# Altium PCB HTMD-PREAMP2.PcbDoc (part 1 of 2)
Units mm, origin at the board's own origin, x right, y up, seen from the top; angles counter-clockwise.
Board outline 220 x 58 mm, 8 copper layers (Top Layer, GND1, S2, POWER1, GND2, S3, POWER2, Bottom Layer); 267 components, 129 nets, 701 pads, 82 vias.
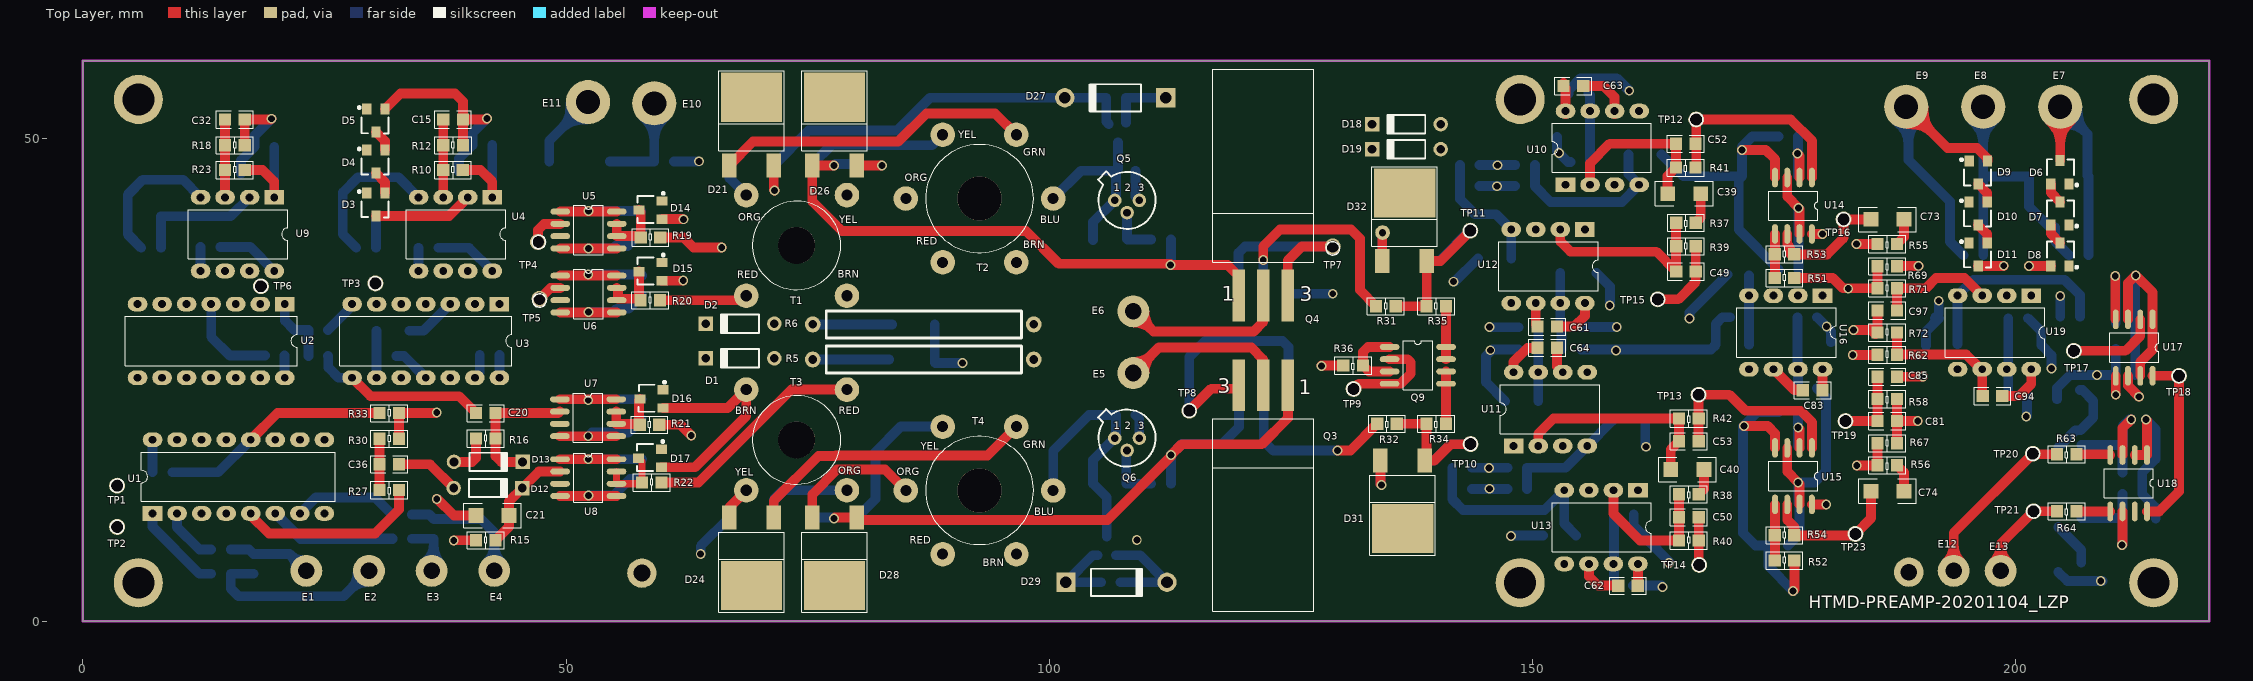
[diagram p0: Top Layer view]
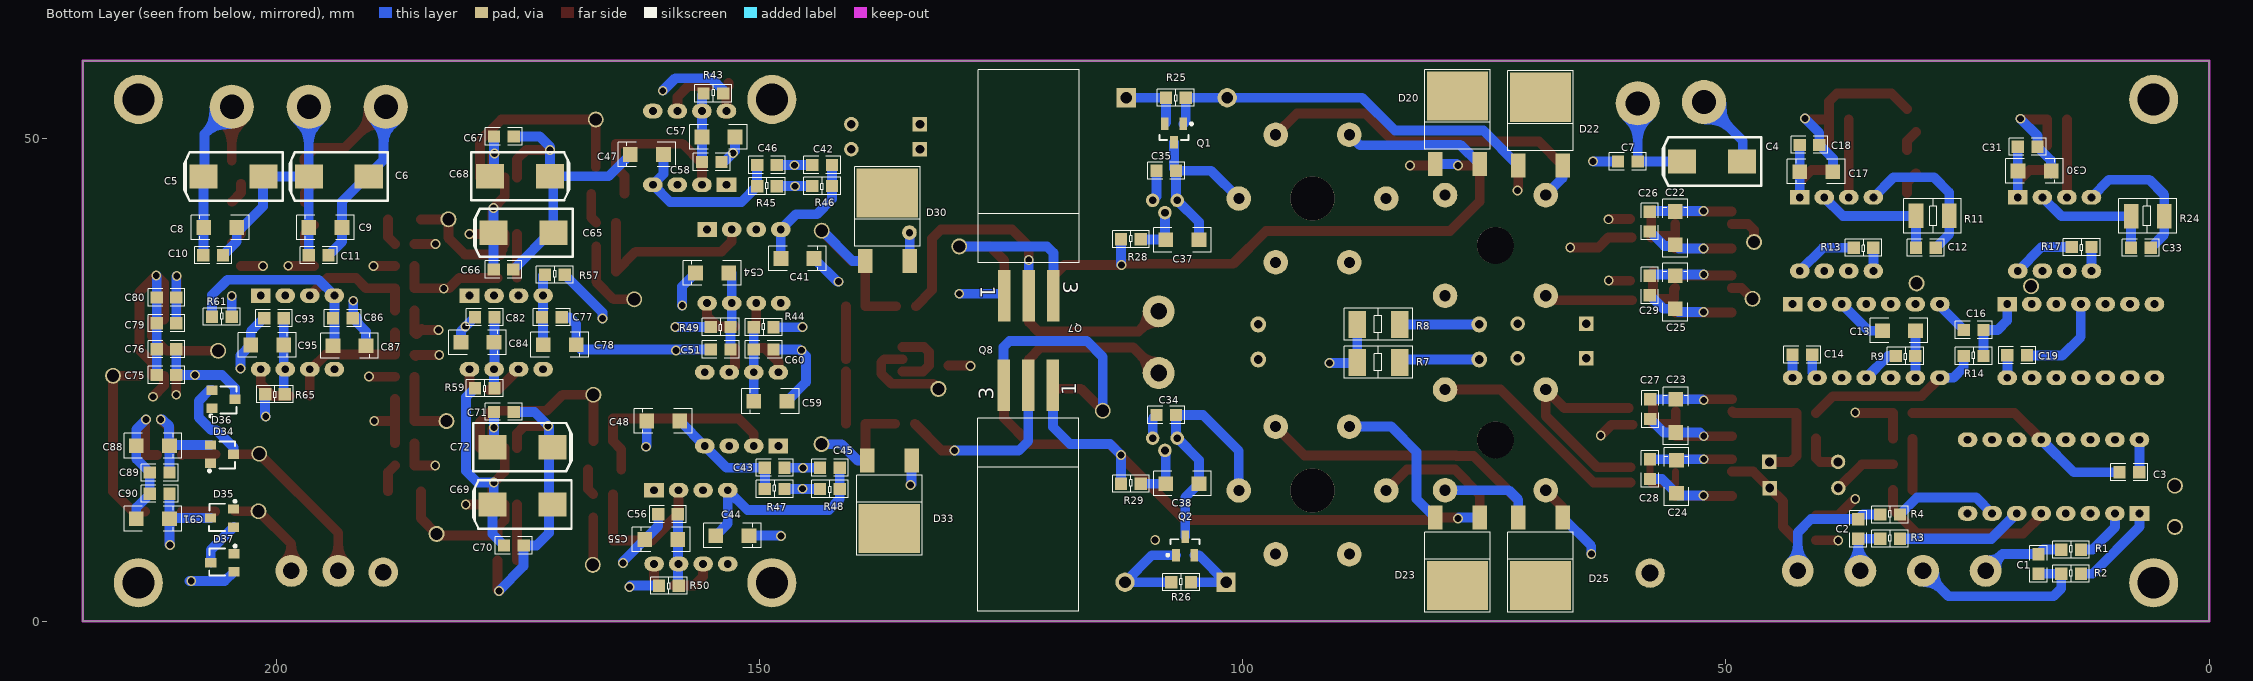
[diagram p1: Bottom Layer view, seen from below]
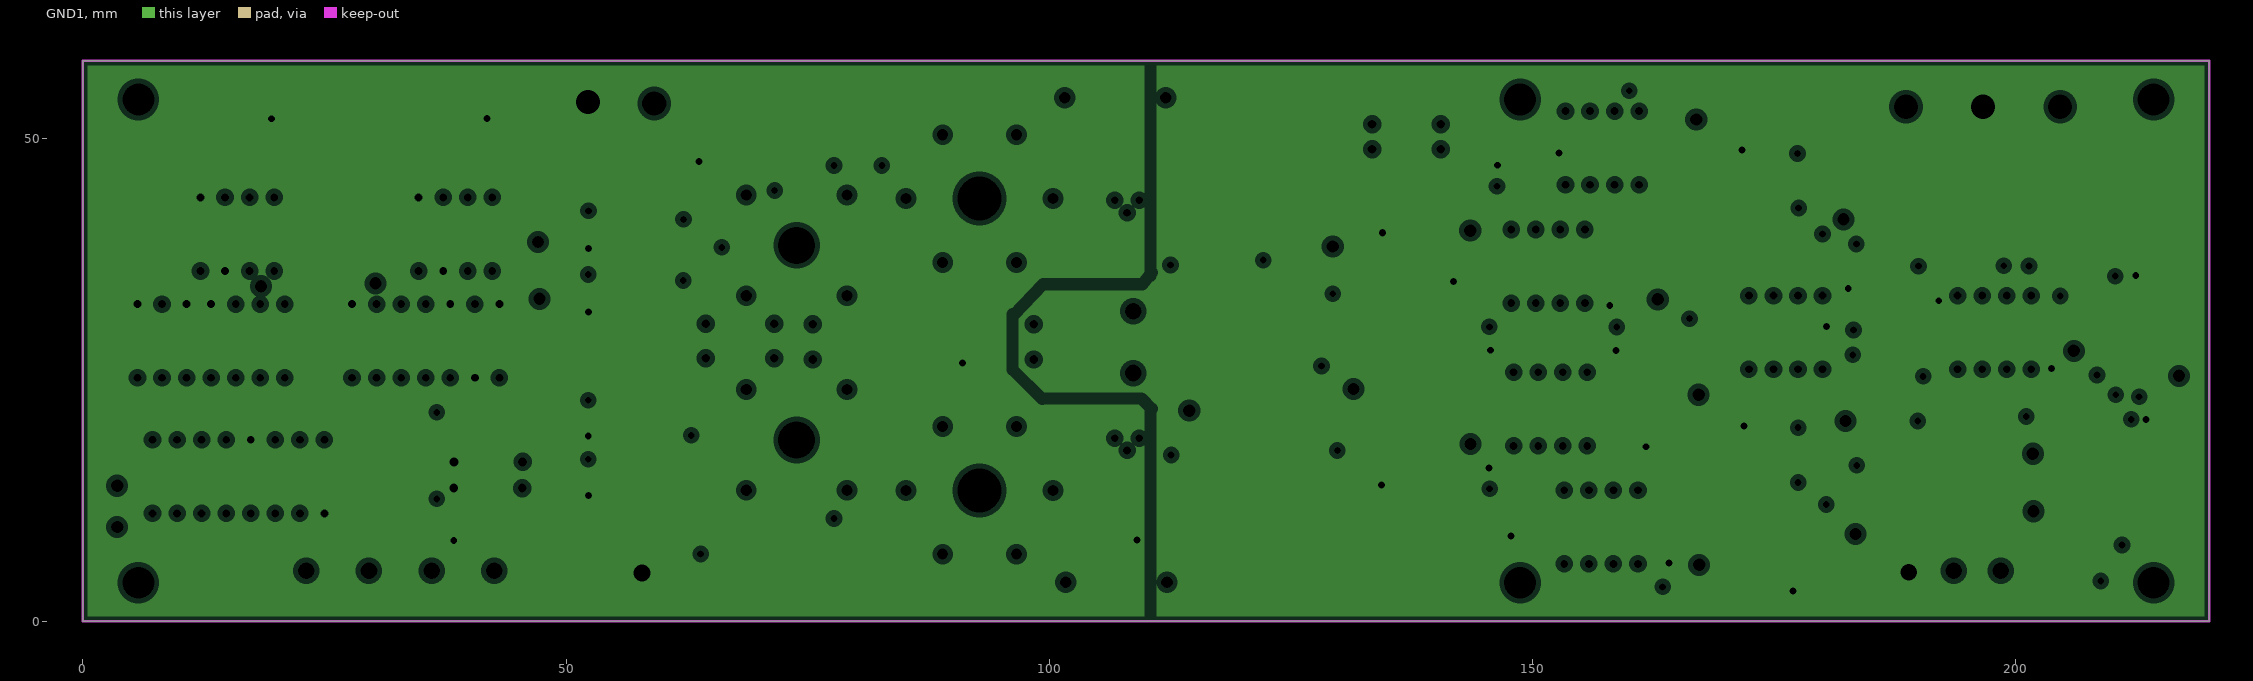
[diagram p2: GND1, clearances drawn from the general rule]
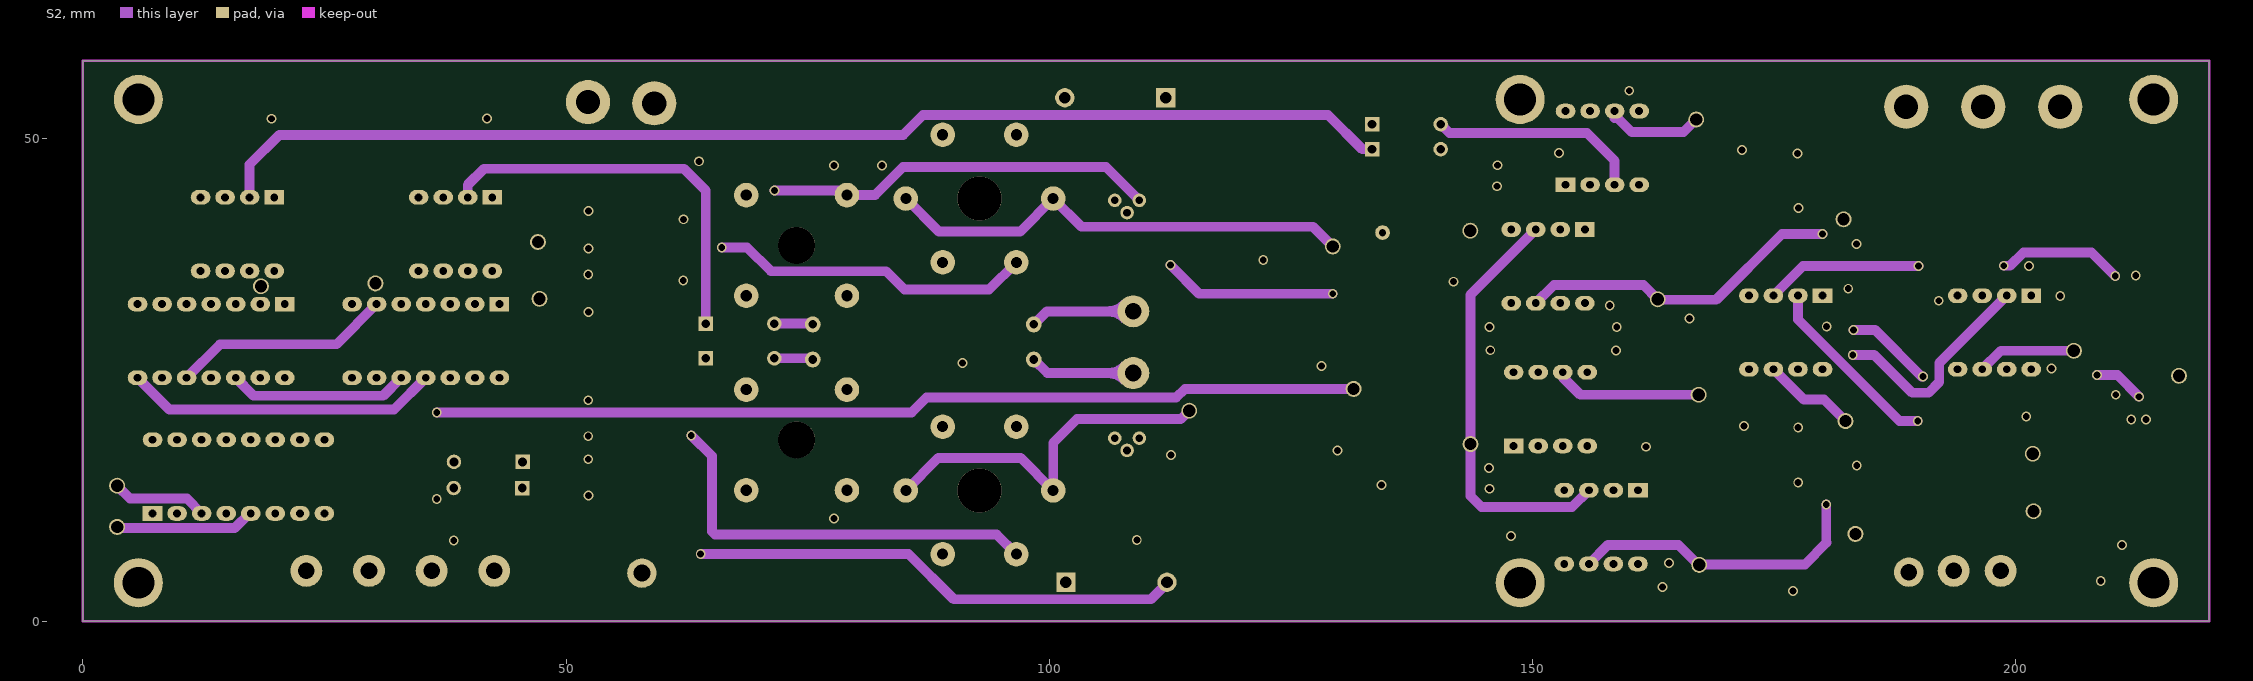
[diagram p3: S2]
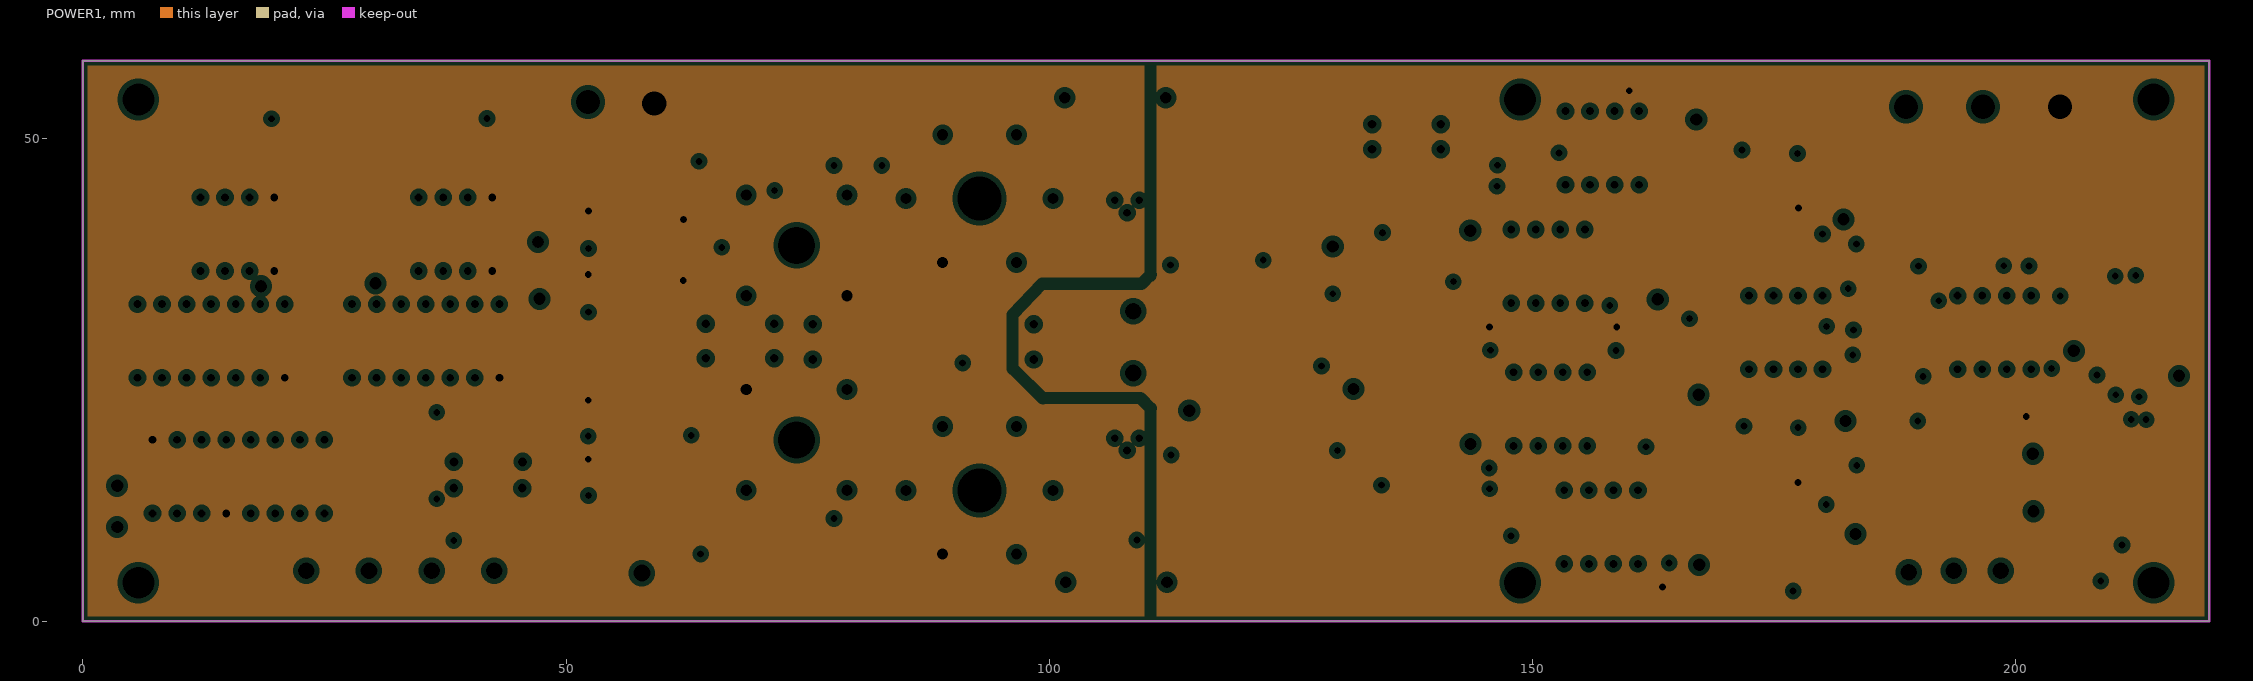
[diagram p4: POWER1, clearances drawn from the general rule]
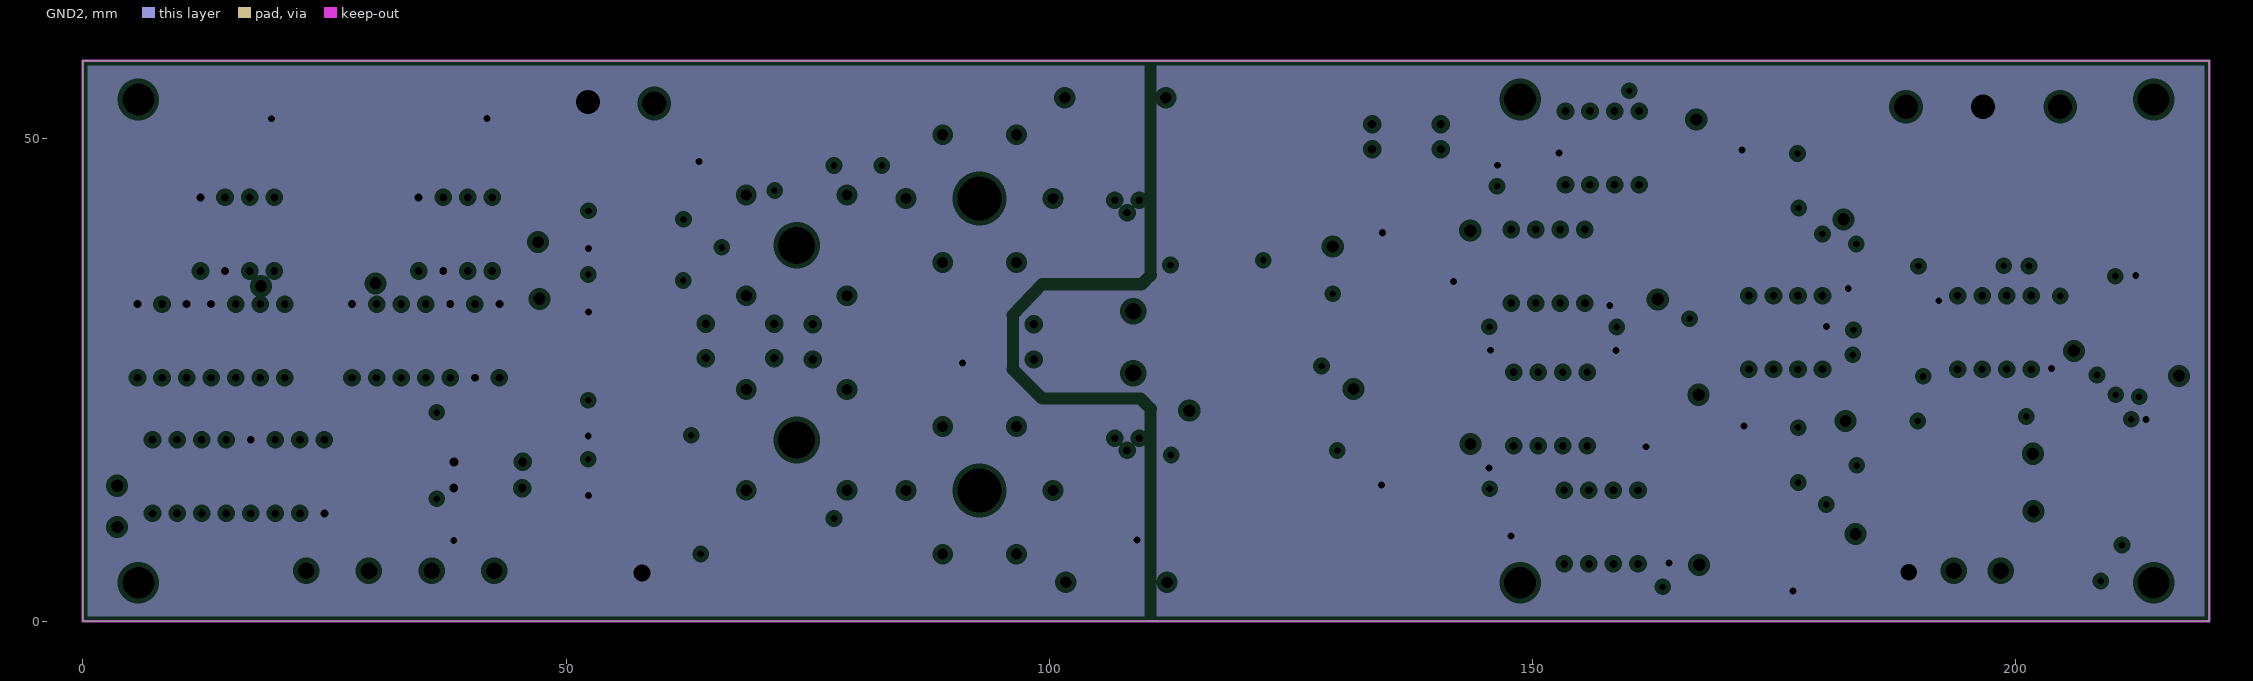
[diagram p5: GND2, clearances drawn from the general rule]
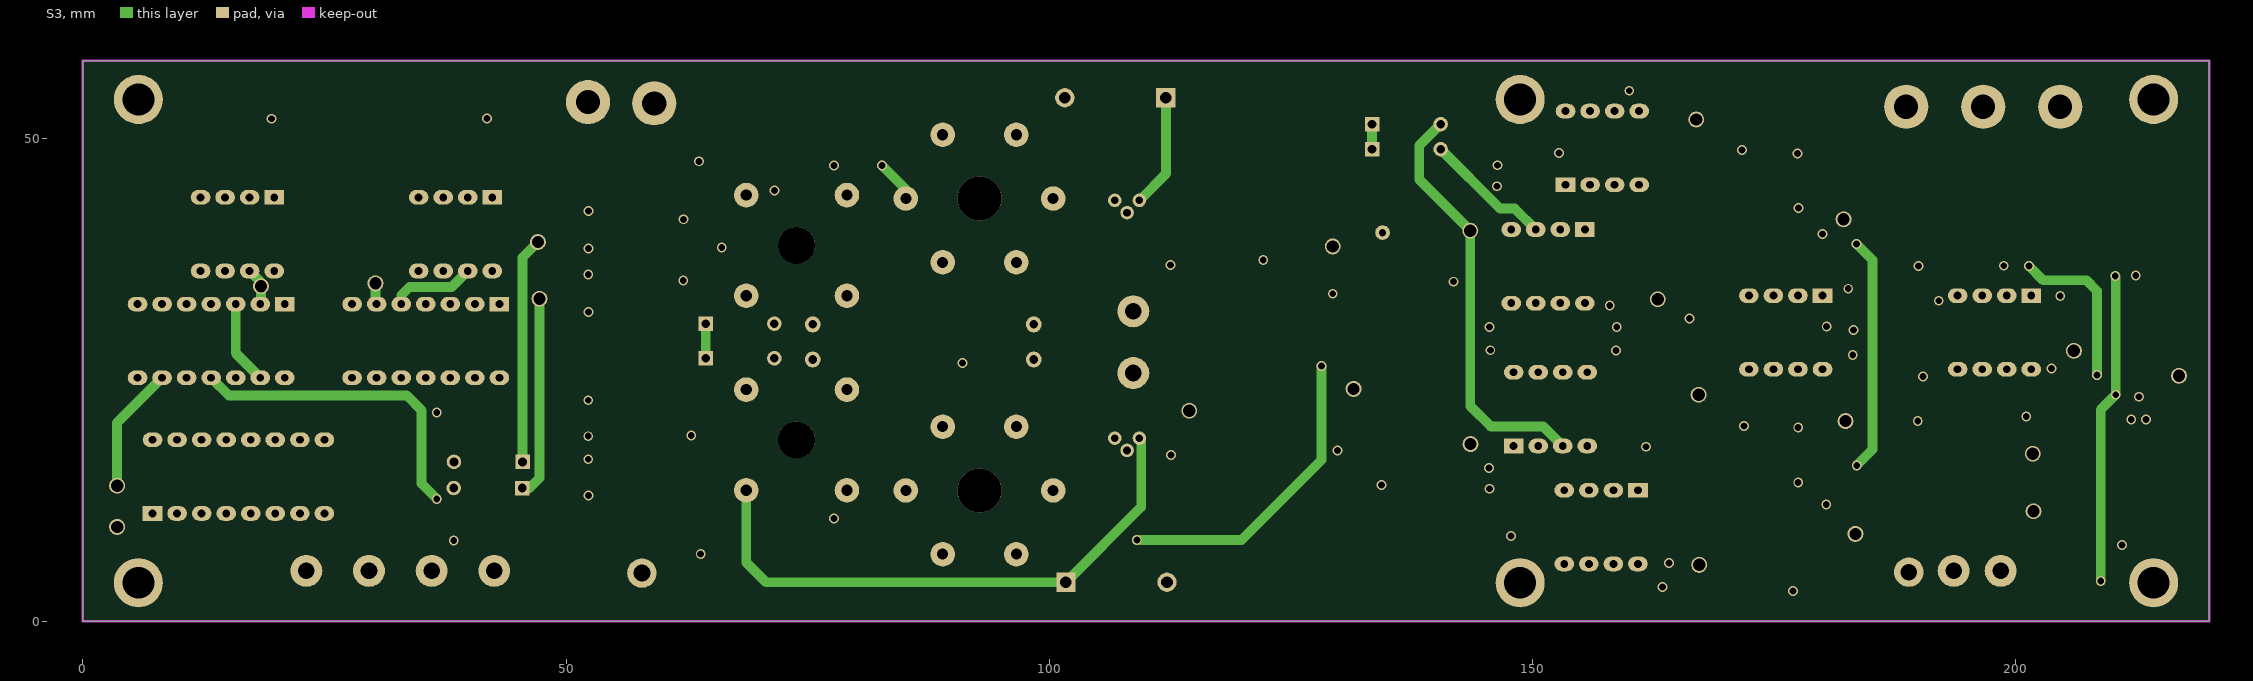
[diagram p6: S3]
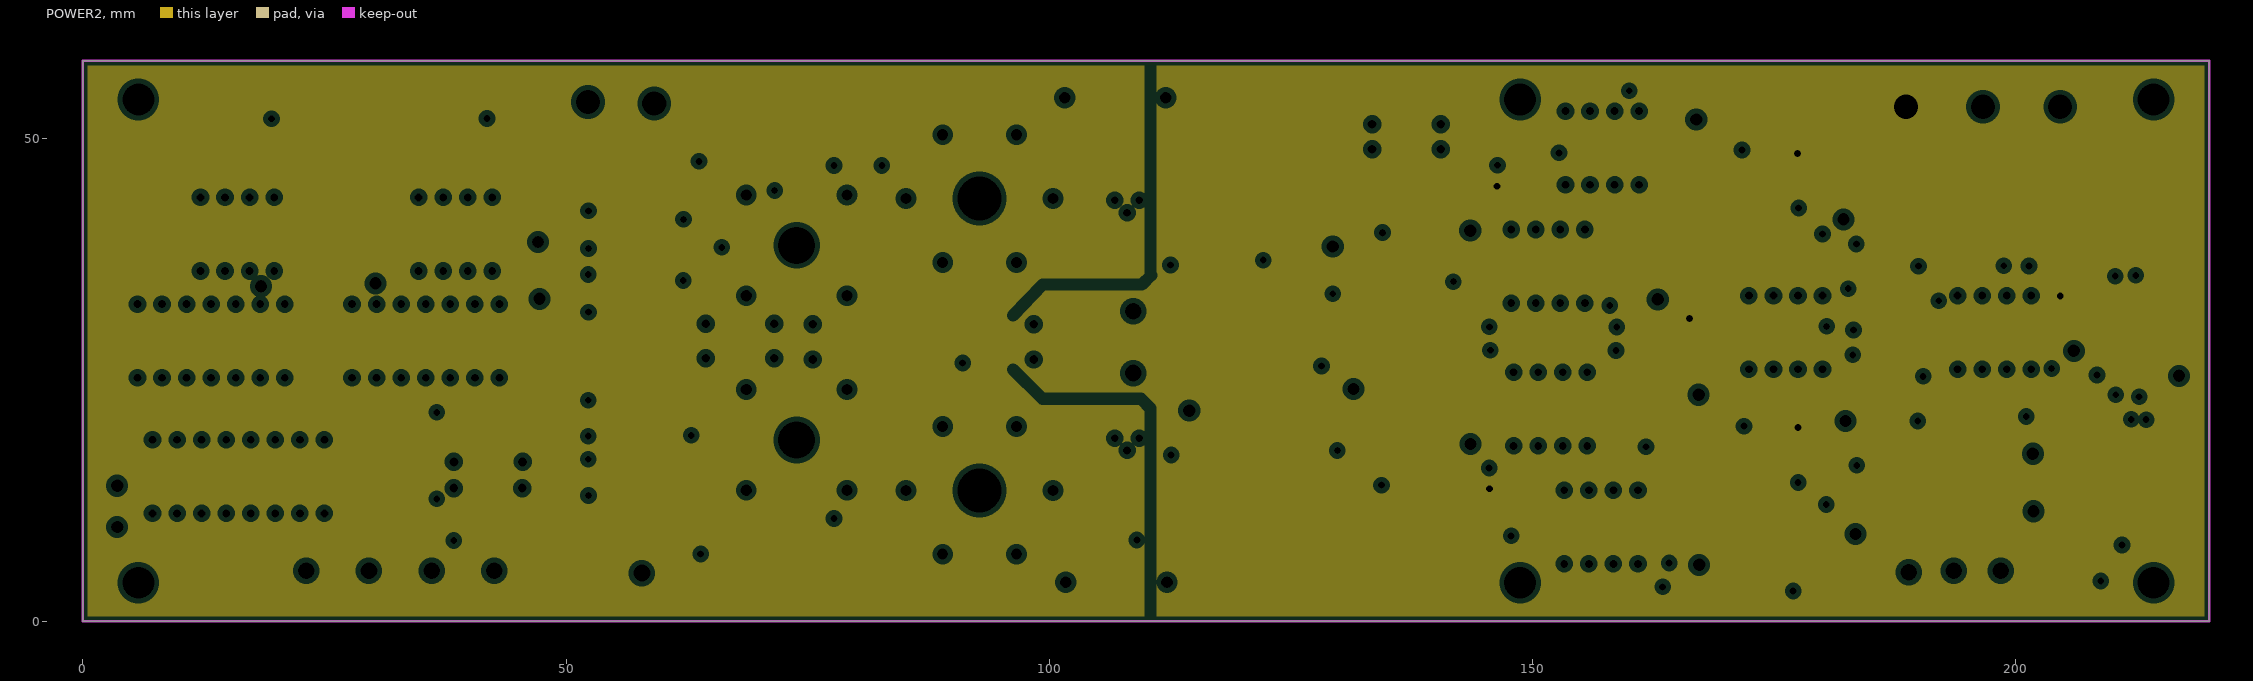
[diagram p7: POWER2, clearances drawn from the general rule]

## Layer stack, top to bottom
Top Solder: solder mask 0.0102, Solder Resist, Dk 3.5
Top Layer: signal copper 0.0356
Dielectric1: core 0.32, FR-4, Dk 4.8
GND1: plane copper 0.036
Dielectric7: prepreg 0.32, FR-4, Dk 4.8
S2: signal copper 0.0356
Dielectric2: core 0.32, FR-4, Dk 4.8
POWER1: plane copper 0.036
Dielectric8: prepreg 0.32, FR-4, Dk 4.8
GND2: plane copper 0.0356
Dielectric9: core 0.32, FR-4, Dk 4.8
S3: signal copper 0.0356
Dielectric3: prepreg 0.32, FR-4, Dk 4.8
POWER2: plane copper 0.0356
Dielectric10: core 0.32, FR-4, Dk 4.8
Bottom Layer: signal copper 0.0356
Bottom Solder: solder mask 0.0102, Solder Resist, Dk 3.5

## Board outline
0,0 0,58 220,58 220,0

## Design rules (kind name [scope] priority, off if disabled: settings)
Clearance [All] p1: gap=0.254 ignorepadtopadclearanceinfootprint=FALSE except(0: Arc-Hole Track-Hole SMDPad-Hole THPad-Hole Via-Hole Fill-Hole Poly-Hole Region-Hole Text-Hole)
ComponentClearance [All] p1 off: gap=0.254 collisioncheckmode=3 verticalgap=0.254 showdistances=FALSE
FabricationTestPointUsage TestPointUsage [All] p1: valid=0 allowmultiple=FALSE
FabricationTestpoint Testpoint [All] p1: side=3 testpointundercomponent=TRUE minsize=1.016 maxsize=2.54 preferedsize=1.524 minholesize=0 maxholesize=1.016 preferedholesize=0.813 testpointgrid=0.025 allowsidetop=TRUE allowsidebottom=TRUE usegrid=TRUE gridtolerance=0
HoleSize [All] p1: absolutevalues=TRUE maxlimit=5.08 minlimit=0.025 maxpercent=80.000 minpercent=20.000
PlaneClearance [All] p1: clearance=0.508
PlaneConnect [All] p1: planeconnectstyle=Relief reliefexpansion=0.508 reliefentries=4 reliefconductorwidth=0.254 reliefairgap=0.254
PolygonConnect Power_PolygonConnect [InNet('+5D')OR InNet('+5V')OR InNet('-5V')OR InNet('+8V')OR InNet('-8V')] p1: connectstyle=Direct reliefconductorwidth=0.254 reliefentries=4 polygonreliefangle="90 Angle" airgapwidth=0.254
PolygonConnect [All] p2: connectstyle=Relief reliefconductorwidth=0.254 reliefentries=4 polygonreliefangle="90 Angle" airgapwidth=0.254
RoutingVias Power_RoutingVias [(InNet('+5V'))or (InNet('+8V'))or (InNet('-5V'))or (InNet('-8V'))] p1: holewidth=0.762 width=1.27 viastyle="Through Hole" minholewidth=0.635 minwidth=0.635 maxholewidth=1.27 maxwidth=1.524
RoutingVias [All] p2: holewidth=0.406 width=0.635 viastyle="Through Hole" minholewidth=0.254 minwidth=0.305 maxholewidth=1.524 maxwidth=2.54
SolderMaskExpansion [All] p1: expansion=0.102
Width Power_Width [InNet('+5D')OR InNet('+5V')OR InNet('-5V')OR InNet('+8V')OR InNet('-8V')] p1: maxlimit=2.54 minlimit=0.254 preferedwidth=1.016
Width Width_1 [All] p2: maxlimit=2.54 minlimit=0.254 preferedwidth=1.016
24 further rules are at their usual default settings.

## Components (designator, comment, footprint, x,y, rotation, side; value= is the part's Value field where it differs from the comment)
C1 "100p" C0805 17.655,4.925 r90 bottom value=100pF
C2 "100p" C0805 36.312,10.582 r270 bottom value=100pF
C3 "0.1u" C0805 7.247,15.425 r0 bottom
C4 "15u" 7343 54.525,47.575 r180 bottom value=15uF
C5 "4.7u" 7343 207.505,46.026 r180 bottom value=4.7uF
C6 "4.7u" 7343 196.617,46.026 r180 bottom value=4.7uF
C7 "0.1u" C0805 61.157,47.575 r180 bottom
C8 "1u" C1206 207.5,40.746 r180 bottom
C9 "1u" C1206 196.617,40.746 r180 bottom
C10 "0.1u" C0805 207.525,37.88 r180 bottom
C11 "0.1u" C0805 194.585,37.88 r0 bottom
C12 "560p" C0805 28.297,38.65 r0 bottom value=560pf
C13 "1n" 1206 30.375,30.075 r0 bottom
C14 "0.1u" C0805 41.075,27.575 r0 bottom
C15 "0.1u" C0805 39.325,51.925 r180 top
C16 "10n" C0805 23.35,30.15 r0 bottom
C17 "1u" C1206 42.367,46.525 r180 bottom
C18 "0.1u" C0805 42.367,49.3 r180 bottom
C19 "0.1u" C0805 18.85,27.525 r0 bottom value=0.1uF
C20 "100n" C0805 40.675,21.55 r0 top value=100nF
C21 "33n" 1206 40.675,10.95 r0 top value=33nF
C22 "1u" C1206 55.242,42.4 r270 bottom
C23 "1u" C1206 55.192,22.975 r270 bottom
C24 "1u" C1206 55.125,16.675 r270 bottom
C25 "1u" C1206 55.242,35.775 r270 bottom
C26 "0.1u" C0805 57.875,40.35 r90 bottom
C27 "0.1u" C0805 57.825,20.943 r90 bottom
C28 "0.1u" C0805 57.85,14.743 r90 bottom
C29 "0.1u" C0805 57.875,33.743 r90 bottom
C30 "1u" C1206 16.35,46.6 r0 bottom
C31 "0.1u" C0805 19.8,49.1 r180 bottom value=0.1uf
C32 "0.1u" C0805 16.752,51.925 r180 top value=0.1uf
C33 "560p" C0805 6.05,38.65 r0 bottom value=560pf
C34 "4700p" C0805 108.925,21.35 r180 bottom value=4700pF
C35 "4700p" C0805 108.925,46.625 r180 bottom value=4700pF
C36 "0.1u" C0805 30.693,16.25 r0 top
C37 "10n" 1206 104.525,39.475 r0 bottom
C38 "10n" 1206 104.525,14.25 r0 bottom
C39 "1" 1206 167.4,44.25 r180 top
C40 "1u" 1206 167.725,15.725 r180 top value=1
C41 "1u" C1206 144.346,37.55 r0 bottom
C42 "0.1" C0805 144.517,47.225 r180 bottom
C43 "0.1" C0805 147.4,15.9 r0 bottom
C44 "1u" C1206 151.075,8.875 r0 bottom
C45 "0.1" C0805 141.685,15.9 r0 bottom
C46 "0.1" C0805 148.2,47.225 r0 bottom
C47 "1u" C1206 163.35,48.3 r180 bottom
C48 "1u" C1206 161.661,20.725 r180 bottom
C49 "5p" C0805 164.85,36.2 r0 top value=5pF
C50 "5p" C0805 165.15,10.775 r0 top value=5pF
C51 "0.1" C0805 152.99,28.125 r0 bottom
C52 "5p" C0805 166.857,49.425 r180 top value=5pF
C53 "5p" C0805 167.182,18.65 r180 top value=5pF
C54 "1u" C1206 156.6,36.05 r180 bottom
C55 "1u" C1206 161.864,8.469 r180 bottom
C56 "0.1" C0805 158.435,11.094 r0 bottom
C57 "1u" C1206 155.945,50.123 r180 bottom
C58 "0.1" C0805 155.943,47.523 r180 bottom
C59 "1u" C1206 150.577,22.775 r180 bottom
C60 "0.1" C0805 150.577,28.125 r180 bottom
C61 "51p" C0805 150.5,30.5 r0 top value=51pF
C62 "51p" C0805 158.853,3.7 r0 top value=51pF
C63 "51p" C0805 155.225,55.395 r180 top value=51pF
C64 "51p" C0805 152.532,28.3 r180 top value=51pF
C65 "10u" 7343 177.495,40.206 r180 bottom value=10uF
C66 "0.1" C0805 175.463,36.4 r0 bottom
C67 "0.1" C0805 175.425,50.175 r0 bottom
C68 "10u" 7343 171.653,46.05 r0 bottom value=10uF
C69 "10u" 7343 177.621,12.106 r180 bottom value=10uF
C70 "0.1u" C0805 174.389,7.85 r0 bottom value=0.1uF
C71 "0.1u" C0805 175.425,21.675 r0 bottom value=0.1uF
C72 "10u" 7343 171.425,18.025 r0 bottom value=10uF
C73 "3900p" 1206 188.429,41.596 r180 top value=3900pF
C74 "3900p" 1206 188.429,13.471 r180 top value=3900pF
C75 "0.1" C0805 210.325,25.496 r0 bottom
C76 "10n" C0805 210.325,28.171 r0 bottom value=10nF
C77 "0.1" C0805 170.45,31.475 r0 bottom
C78 "1u" C1206 168.945,28.625 r0 bottom
C79 "0.1" C0805 210.325,30.846 r0 bottom
C80 "10n" C0805 210.325,33.521 r0 bottom value=10nF
C81 "27p" C0805 185.675,20.726 r0 top value=27pF
C82 "0.1" C0805 177.4,31.475 r0 bottom
C83 "51p" C0805 177.962,23.925 r0 top value=51pF
C84 "1u" C1206 177.45,28.875 r0 bottom
C85 "1200p" C0805 187.707,25.306 r180 top value=1200pF
C86 "0.1" C0805 192.075,31.371 r0 bottom
C87 "1u" C1206 190.695,28.521 r0 bottom
C88 "1u" C1206 211.033,18.171 r0 bottom
C89 "0.1u" C0805 211.033,15.396 r0 bottom
C90 "0.1u" C0805 213.065,13.196 r180 bottom
C91 "1u" C1206 211.033,10.621 r0 bottom
C93 "0.1" C0805 199.204,31.371 r0 bottom
C94 "51p" C0805 196.564,23.321 r0 top value=51pF
C95 "1u" C1206 199.204,28.596 r0 bottom
C97 "560p" C0805 185.675,32.176 r0 top value=560pF
D1 "1N914B" DO-35 61.86,27.15 r180 top
D2 "1N914B" DO-35 61.86,30.729 r180 top
D3 "M1MA152AT1_SC-59" SC-59 29.389,44.338 r180 top
D4 "M1MA152AT1_SC-59" SC-59 29.389,48.762 r180 top
D5 "M1MA152AT1_SC-59" SC-59 29.389,53.025 r180 top
D6 "M1MA152AT1_SC-59" SC-59 205.5,45.275 r0 top
D7 "M1MA152AT1_SC-59" SC-59 205.5,41.025 r0 top
D8 "M1MA152AT1_SC-59" SC-59 205.5,36.775 r0 top
D9 "M1MA152AT1_SC-59" SC-59 195.175,47.638 r180 top
D10 "M1MA152AT1_SC-59" SC-59 195.15,43.4 r180 top
D11 "M1MA152AT1_SC-59" SC-59 195.15,39.163 r180 top
D12 "1N914B" DO-35 48.066,13.876 r0 top
D13 "1N914B" DO-35 48.091,16.576 r0 top
D14 "M1MA152AT1_SC-59" SC-59 59.925,43.5 r90 top
D15 "M1MA152AT1_SC-59" SC-59 59.925,37.125 r90 top
D16 "M1MA152AT1_SC-59" SC-59 60.05,23.95 r90 top
D17 "M1MA152AT1_SC-59" SC-59 59.875,17.825 r90 top
D18 "1N914B" DO-35 130.8,51.375 r180 top
D19 "1N914B" DO-35 130.8,48.775 r180 top
D20 "CSD01060_TO-225-2" TO-225-2 77.775,51.562 r180 bottom
D21 "CSD01060_TO-225-2" TO-225-2 69.188,51.437 r0 top
D22 "CSD01060_TO-225-2" TO-225-2 69.188,51.437 r180 bottom
D23 "CSD01060_TO-225-2" TO-225-2 77.775,6.489 r0 bottom
D24 "CSD01060_TO-225-2" TO-225-2 69.188,6.489 r180 top
D25 "CSD01060_TO-225-2" TO-225-2 69.188,6.489 r0 bottom
D26 "CSD04060E_TO-225-2" TO-225-2 77.775,51.437 r0 top
D27 "1N4740A_DO-41" DO-41 101.6,54.175 r180 top
D28 "CSD04060E_TO-225-2" TO-225-2 77.775,6.489 r180 top
D29 "1N4740A_DO-41" DO-41 112.175,4.05 r0 top
D30 "CSD04060E_TO-225-2" TO-225-2 136.752,41.534 r180 bottom
D31 "CSD04060E_TO-225-2" TO-225-2 136.552,12.394 r180 top
D32 "CSD04060E_TO-225-2" TO-225-2 136.752,41.534 r0 top
D33 "CSD04060E_TO-225-2" TO-225-2 136.552,12.394 r0 bottom
D34 "M1MA152AT1_SC-59" SC-59 206.775,16.366 r270 bottom
D35 "M1MA152AT1_SC-59" SC-59 204.387,11.635 r90 bottom
D36 "M1MA152AT1_SC-59" SC-59 206.625,22.05 r270 bottom
D37 "M1MA152AT1_SC-59" SC-59 204.375,7 r90 bottom
E1 "InOut" TERMSIGNAL#1 23.384,5.225 r180 top
E2 "InOut" TERMSIGNAL#2 29.609,5.225 r180 top
E3 "InOut" TERMSIGNAL#2 36.087,5.225 r180 top
E4 "InOut" TERMSIGNAL#3 41.804,5.225 r180 top
E5 "InOut" TERMSIGNAL#4 108.69,25.95 r0 top
E6 "InOut" TERMSIGNAL#5 108.7,31.8 r0 top
E7 "InOut" TERMPOWER#1 208.775,53.246 r270 top
E8 "InOut" TERMPOWER#2 199.5,53.246 r270 top
E9 "InOut" TERMPOWER#3 190.225,53.246 r270 top
E10 "InOut" TERMPOWER#4 59.125,53.6 r90 top
E11 "InOut" TERMPOWER#4 52.275,53.725 r90 top
E12 "InOut" TERMSIGNAL#3 194.325,5.225 r0 top
E13 "InOut" TERMSIGNAL#2 198.425,5.225 r0 top
Q1 "BSS123_SOT-23" SOT-23 106.15,51.475 r0 bottom
Q2 "BSS123_SOT-23" SOT-23 106.896,6.85 r180 bottom
Q3 "STFV4N150_TO-220FH" TO-220FH 122.125,16.6 r180 top
Q4 "STFV4N150_TO-220FH" TO-220FH 122.125,41.544 r0 top
Q5 "2N4392-TO-18" TO-18 108.04,42.925 r270 top
Q6 "2N4392-TO-18" TO-18 108.04,18.325 r270 top
Q7 "STFV4N150_TO-220FH" TO-220FH 122.125,41.5 r180 bottom
Q8 "STFV4N150_TO-220FH" TO-220FH 122.175,16.625 r0 bottom
Q9 "TD9944TG_SO-8" SO-8 135.2,28.4 r0 top
R1 "301" R0805 15.305,7.425 r180 bottom
R2 "301" R0805 15.305,4.925 r180 bottom
R3 "301" R0805 34.032,8.55 r180 bottom
R4 "301" R0805 34.032,11.05 r180 bottom
R5 "200k" MG680 98.385,27.1 r180 top value=200K
R6 "200k" MG680 98.385,30.729 r180 top value=200K
R7 "3.3k" 2010 88.14,26.8 r180 bottom value=3.3K
R8 "3.3k" 2010 88.14,30.729 r180 bottom value=3.3K
R9 "205" R0805 30.4,27.451 r0 bottom
R10 "5.11k" R0805 37.287,46.7 r0 top value=5.11K
R11 "10k" R1206 26.9,41.95 r0 bottom
R12 "221" R0805 37.3,49.25 r0 top
R13 "511" R0805 34.747,38.65 r0 bottom
R14 "365" R0805 25.382,27.451 r180 bottom
R15 "196" R0805 40.675,8.4 r0 top
R16 "178.4" R0805 40.675,18.925 r0 top
R17 "511" R0805 12.18,38.725 r0 bottom
R18 "309" R0805 14.72,49.25 r0 top
R19 "13.3" R0805 57.718,39.725 r0 top
R20 "30.1" R0805 57.693,33.225 r0 top
R21 "19.6" R0805 57.618,20.35 r0 top
R22 "30.1" R0805 57.85,14.375 r0 top
R23 "5.11k" R0805 14.72,46.7 r0 top value=5.11K
R24 "2K" R1206 8.075,41.925 r180 bottom
R25 "1K" R0805 105.893,54.175 r0 bottom
R26 "1K" R0805 107.375,4.05 r180 bottom
R27 "100" R0805 32.725,13.6 r180 top
R28 "24.9" R0805 112.575,39.525 r180 bottom
R29 "24.9" R0805 112.575,14.25 r180 bottom
R30 "100" R0805 30.693,18.9 r0 top
R31 "0" R0805 133.8,32.6 r0 top
R32 "0" R0805 135.95,20.45 r180 top
R33 "1.02K" R0805 30.693,21.55 r0 top
R34 "0" R0805 141.042,20.45 r180 top
R35 "0" R0805 139.01,32.6 r0 top
R36 "0" R0805 132.45,26.475 r180 top
R37 "10" R0805 166.882,41.25 r180 top
R38 "10" R0805 167.182,13.15 r180 top
R39 "205" R0805 164.85,38.8 r0 top
R40 "205" R0805 165.15,8.375 r0 top
R41 "205" R0805 166.857,46.95 r180 top
R42 "205" R0805 167.182,21 r180 top
R43 "10.2" R0805 155.777,54.625 r180 bottom
R44 "10.2" R0805 150.577,30.425 r180 bottom
R45 "10.2" R0805 150.232,45.025 r180 bottom
R46 "10.2" R0805 142.485,45.05 r0 bottom
R47 "10.2" R0805 149.432,13.7 r180 bottom
R48 "10.2" R0805 141.685,13.7 r0 bottom
R49 "10.2" R0805 152.99,30.45 r0 bottom
R50 "10.2" R0805 158.343,3.7 r0 bottom
R51 "226" R0805 175.05,35.525 r0 top
R52 "226" R0805 175.05,6.3 r0 top
R53 "4.02K" R0805 175.05,37.975 r0 top
R54 "4.02K" R0805 175.05,8.9 r0 top
R55 "100" R0805 187.707,39.046 r180 top
R56 "100" R0805 187.707,16.146 r180 top
R57 "10.2" R0805 172.182,35.875 r180 bottom
R58 "953" R0805 187.707,23.016 r180 top
R59 "10.2" R0805 177.4,24.125 r0 bottom
R61 "10.2" R0805 206.625,31.525 r180 bottom
R62 "0" R0805 185.675,27.596 r0 top
R63 "49.9" R0805 206.275,17.291 r180 top
R64 "49.9" R0805 206.275,11.396 r180 top
R65 "10.2" R0805 199.104,23.496 r0 bottom
R67 "0" R0805 185.675,18.436 r0 top
R69 "0" R0805 187.707,36.756 r180 top
R71 "1.05K" R0805 185.675,34.466 r0 top
R72 "226" R0805 185.675,29.886 r0 top
T1 "Tran2" TRAN2 73.85,38.9 r180 top
T2 "Tran3" TRAN3 92.775,43.75 r180 top
T3 "Tran2" TRAN2 73.85,18.775 r0 top
T4 "Tran3" TRAN3 92.775,13.55 r180 top
TP1 "TestPoint" TEST_SMALL#1 3.55,14.037 r0 top
TP2 "TestPoint" TEST_SMALL#1 3.55,9.774 r0 top
TP3 "TestPoint" TEST_SMALL#1 30.275,34.975 r90 top
TP4 "TestPoint" TEST_SMALL#2 47.175,39.25 r0 top
TP5 "TestPoint" TEST_SMALL#3 47.25,33.2 r0 top
TP6 "TestPoint" TEST_SMALL#1 18.425,34.675 r0 top
TP7 "TestPoint" TEST_SMALL#4 129.325,38.6 r0 top
TP8 "TestPoint" TEST_SMALL#1 114.475,21.8 r90 top
TP9 "TestPoint" TEST_SMALL#1 131.475,24.05 r0 top
TP10 "TestPoint" TEST_SMALL#1 143.575,18.35 r90 top
TP11 "TestPoint" TEST_SMALL#1 143.55,40.425 r90 top
TP12 "TestPoint" TEST_SMALL#1 166.925,51.925 r0 top
TP13 "TestPoint" TEST_SMALL#1 167.175,23.45 r0 top
TP14 "TestPoint" TEST_SMALL#1 167.232,5.85 r0 top
TP15 "TestPoint" TEST_SMALL#1 162.95,33.325 r0 top
TP16 "TestPoint" TEST_SMALL#1 182.175,41.6 r90 top
TP17 "TestPoint" TEST_SMALL#1 206,27.996 r90 top
TP18 "TestPoint" TEST_SMALL#1 216.875,25.407 r90 top
TP19 "TestPoint" test_small 182.375,20.725 r90 top
TP20 "TestPoint" TEST_SMALL#1 201.75,17.346 r270 top
TP21 "TestPoint" TEST_SMALL#1 201.825,11.396 r270 top
TP23 "TestPoint" test_small 183.4,9.05 r90 top
U1 "DS26C32AMJ/883_DIP16" DIP16 7.215,11.175 r90 top
U2 "CD54ACT00F3A_DIP14" DIP14 20.9,32.826 r270 top
U3 "SNJ54ACT04W_DIP14" DIP14 43.1,32.826 r270 top
U4 "AD790SQ" DIP8 42.367,43.875 r270 top
U5 "TC4429EOA" SO-8 49.4,42.4 r0 top
U6 "TC4429EOA" SO-8 49.4,35.775 r0 top
U7 "TC4429EOA" SO-8 49.35,22.975 r0 top
U8 "TC4429EOA" SO-8 49.375,16.775 r0 top
U9 "AD790SQ" DIP8 19.8,43.875 r270 top
U10 "AD797_DIP8" DIP8 153.405,45.175 r90 top
U11 "AD797_DIP8" DIP8 148.037,18.158 r90 top
U12 "AD797_DIP8" DIP8 155.405,40.545 r270 top
U13 "AD797_DIP8" DIP8 160.898,13.57 r270 top
U14 "AD8130_SO-8" SO-8 178.891,45.925 r270 top
U15 "AD8130_SO-8" SO-8 178.891,17.948 r270 top
U16 "AD797_DIP8" DIP8 179.994,33.705 r270 top
U17 "LTC1560-1_SO-8" SO-8 214.137,31.249 r270 top
U18 "AD8131_SO-8" SO-8 213.573,17.216 r270 top
U19 "AD797_DIP8" DIP8 201.594,33.705 r270 top

## Footprints (in the part's own frame and the unit in brackets; to place one, negate y for a bottom-side part, rotate by r counter-clockwise, add the part's x,y. Pads: shape width x height; smd on the part's side, far side on the other; paste and mask are expansions set on the pad)
1206 [mil]
  rect 60x60 smd: 1(0,0) 2(135,0)
  silkscreen extent -50,-50 185,50
2010 [mil]
  rect 72x110 smd: 1(0,0) 2(173.23,0)
  silkscreen extent -53,-65 227,65
7343 [mm]
  rect 2.9x2.5 smd: 1(0,0) 2(6.2,0)
  silkscreen extent -2,-2.5 8.18,2.5, body extent -0.55,-2.02 6.75,2.28, height 2.9
C0805 [mil]
  rect 50x50 smd: 1(0,0) 2(80,0)
  silkscreen extent -35,-35 115,35
C1206 [mil]
  rect 60x60 smd: 1(0,0) 2(135,0)
  silkscreen extent -50,-50 185,50
DIP8 [mil]
  rect 60x80 hole 32: 1(0,0)
  oval 60x80 hole 32: 2(0,-100) 3(0,-200) 4(0,-300) 5(300,-300) 6(300,-200) 7(300,-100) 8(300,0)
  silkscreen extent 50,-350 250,55
DIP14 [mil] "DIP14"
  rect 60x80 hole 32: 1(0,0)
  oval 60x80 hole 32: 2(0,-100) 3(0,-200) 4(0,-300) 5(0,-400) 6(0,-500) 7(0,-600) 8(300,-600) 9(300,-500) 10(300,-400) 11(300,-300) 12(300,-200) 13(300,-100) 14(300,0)
  silkscreen extent 50,-650 250,50
DIP16 [mil] "DIP16"
  rect 60x80 hole 32: 1(0,0)
  oval 60x80 hole 32: 2(0,-100) 3(0,-200) 4(0,-300) 5(0,-400) 6(0,-500) 7(0,-600) 8(0,-700) 9(300,-700) 10(300,-600) 11(300,-500) 12(300,-400) 13(300,-300) 14(300,-200) 15(300,-100) 16(300,0)
  silkscreen extent 50,-745 250,45
DO-35 [mm]
  round 1.5 hole 0.9: 1(-9.691,-0.076)
  rect 1.5x1.5 hole 0.9: 2(-2.591,-0.076)
  silkscreen extent -8.09,-1.03 -4.09,0.87
DO-41 [mm]
  rect 2x2 hole 1.2: 1(-10.46,0)
  round 2 hole 1.2: 2(0,0)
  silkscreen extent -7.88,-1.4 -2.47,1.4
MG680 [mil]
  round 65 hole 35: 1(0,0) 2(900,0)
  silkscreen extent 50,-55 845,55
R0805 [mil]
  rect 50x50 smd: 1(0,0) 2(80,0)
  silkscreen extent -35,-35 115,35
R1206 [mil]
  rect 60x100 smd: 1(0,0) 2(135,0)
  silkscreen extent -50,-70 185,70
SC-59 [mil]
  rect 38x45 smd: 1(0,0) 2(-74,0) 3(-37,94)
  silkscreen extent -89,-10 36,100
SO-8 [mil]
  oval 80x24 smd: 1(0,0) 2(0,-50) 3(0,-100) 4(0,-150) 5(230,-150) 6(230,-100) 7(230,-50) 8(230,0)
  silkscreen extent 55,-175 175,25
SOT-23 [mm]
  rect 0.787x1.27 smd: 1(0,0) 2(1.9,0) 3(0.95,1.9)
  silkscreen extent -0.97,-0.12 2.45,1.65
TERMPOWER#1 [mil]
  round 180 hole 98: 1(0,-165.01)
TERMPOWER#2 [mil]
  round 180 hole 98: 1(0,-113.5)
TERMPOWER#3 [mil]
  round 180 hole 98: 1(0,-62)
TERMPOWER#4 [mil]
  round 180 hole 98: 1(0,0)
TERMSIGNAL#1 [mil]
  round 130 hole 68: 1(10,0)
TERMSIGNAL#2 [mil]
  round 130 hole 68: 1(0,0)
TERMSIGNAL#3 [mil]
  round 130 hole 68: 1(-30,0)
TERMSIGNAL#4 [mil]
  round 130 hole 68: 1(0,-10)
TERMSIGNAL#5 [mil]
  round 130 hole 68: 1(-0.39,10.98)
TEST_SMALL#1 [mil]
  round 65 hole 50: 1(0,0)
  silkscreen extent -27,-27 28,27
TEST_SMALL#2 [mil]
  round 65 hole 50: 1(-3.33,0)
  silkscreen extent -27,-27 28,27
TEST_SMALL#3 [mil]
  round 65 hole 50: 1(0,6.89)
  silkscreen extent -27,-27 28,27
TEST_SMALL#4 [mil]
  round 65 hole 50: 1(0,7.6)
  silkscreen extent -27,-27 28,27
test_small [mil]
  round 65 hole 50: 1(0,0)
  silkscreen extent -27,-28 27,27
TO-18 [mm]
  round 1.4 hole 0.8: 1(-0.635,-1.27) 2(0.635,0) 3(-0.635,1.27)
  silkscreen extent -3.64,-3 2.31,2.95
TO-220FH [mm]
  rect 1.27x5.35 smd: 1(-2.54,-7.818) 2(0,-7.818) 3(2.54,-7.818)
  silkscreen extent -5.21,-4.38 5.21,15.56
TO-225-2 [mm]
  rect 6.35x5.08 smd: 0(0,2.794)
  rect 1.5x2.5 smd: 1(-2.3,-4.255) 2(2.3,-4.255)
  silkscreen extent -3.4,-2.73 3.4,5.52
TRAN2 [mil]
  round 150 hole 150: 0(0,0)
  round 100 hole 45: 1(-205,-205) 2(205,-205) 3(205,205) 4(-205,205)
  silkscreen extent -180,-180 180,180
TRAN3 [mil]
  round 180 hole 180: 0(0,0)
  round 100 hole 45: 1(-150,259.81) 2(-300,0) 3(-150,-259.81) 4(150,-259.81) 5(300,0) 6(150,259.81)
  silkscreen extent -220,-220 220,220

## Part data
C1 C2 C3 C7 C8 C9 C10 C11 C12 C13 C14 C15 C16 C17 C18 C19 C20 C21 C22 C23 C24 C25 C26 C27 C28 C29 C30 C31 C32 C33 C34 C35 C36 C37 C38 C39 C40 C41 C42 C43 C44 C45 C46 C47 C48 C49 C50 C51 C52 C53 C54 C55 C56 C57 C58 C59 C60 C61 C62 C63 C64 C66 C67 C70 C71 C73 C74 C75 C76 C77 C78 C79 C80 C81 C82 C83 C84 C85 C86 C87 C88 C89 C90 C91 C93 C94 C95 C97: library part Cap, "Capacitor", LatestRevisionDate=17-Jul-2002, LatestRevisionNote="Re-released for DXP Platform.", Published=8-Jun-2000, Publisher="Altium Limited"
  C1 C2 C7 C19 C34 C35 C36 C52 C85: PackageReference=C0805
  C3 C8 C9 C10 C11 C12 C13 C14 C15 C16 C17 C18 C20 C21 C22 C23 C24 C25 C26 C27 C28 C29 C30 C31 C32 C33 C39 C40 C41 C42 C43 C44 C45 C46 C47 C48 C49 C50 C51 C53 C54 C55 C56 C57 C58 C59 C60 C61 C62 C63 C64 C66 C67 C70 C71 C73 C74 C75 C76 C77 C78 C79 C80 C81 C82 C83 C84 C86 C87 C88 C89 C90 C91 C93 C94 C95 C97: PackageReference=RAD-0.3
  C37 C38: PackageReference=C1206
C4 C5 C6: library part "Cap Pol1", "Polarized Capacitor (Radial)", LatestRevisionDate=17-Jul-2002, LatestRevisionNote="Re-released for DXP Platform.", Published=8-Jun-2000, Publisher="Altium Limited"
  C4: PackageReference=7343
  C5 C6: PackageReference=C1210
C65 C68 C69 C72: library part "Cap Pol3", "Polarized Capacitor (Surface Mount)", LatestRevisionDate=17-Jul-2002, LatestRevisionNote="Re-released for DXP Platform.", PackageReference=C0805, Published=8-Jun-2000, Publisher="Altium Limited"
D3 D4 D5: library part M1MA152AT1, "single silicon switching diodes", PackageDocument=Sep-1996, Code_JEDEC=DO-214-AB, LatestRevisionDate=17-Jul-2002, LatestRevisionNote="Re-released for DXP Platform.", PackageReference=SMC, Published=8-Jun-2000, Publisher="Altium Limited"
D6 D7 D8 D9 D10 D11 D34 D35 D36 D37: library part M1MA152AT1
D14 D15 D16 D17: library part M1MA152AT1_1, "single silicon switching diodes", PackageDocument=Sep-1996, Code_JEDEC=DO-214-AB, LatestRevisionDate=17-Jul-2002, LatestRevisionNote="Re-released for DXP Platform.", PackageReference=SMC, Published=8-Jun-2000, Publisher="Altium Limited"
D20 D21 D22 D23 D24 D25: library part CSD01060, "CSD01060"
D26 D28 D30 D31 D32 D33: library part CSD04060E, "CSD04060E"
D27 D29: library part 1N4740A, "Schottky Rectifier"
Q1 Q2: library part BSS123, "BSS123"
Q3 Q4 Q7 Q8: library part STFV4N150
Q5 Q6: library part MPF4392
Q9: library part TD9944
R1 R2 R3 R4 R5 R6 R7 R8 R9 R10 R11 R12 R13 R14 R15 R16 R17 R18 R19 R20 R21 R22 R23 R24 R25 R26 R27 R28 R29 R30 R31 R32 R33 R34 R35 R36 R37 R38 R39 R40 R41 R42 R43 R44 R45 R46 R47 R48 R49 R50 R51 R52 R53 R54 R55 R56 R57 R58 R59 R61 R62 R63 R64 R65 R67 R69 R71 R72: library part Res1, "Resistor", LatestRevisionDate=17-Jul-2002, LatestRevisionNote="Re-released for DXP Platform.", Published=8-Jun-2000, Publisher="Altium Limited"
  R1 R2 R3 R4 R5 R6 R7 R8 R9 R10 R11 R12 R13 R14 R15 R16 R17 R18 R23 R24 R28 R29 R32 R38 R39 R40 R41 R42 R43 R44 R45 R46 R49 R51 R52 R53 R54 R55 R56 R57 R58 R59 R61 R62 R65 R67 R69 R71 R72: PackageReference=AXIAL-0.3
  R19 R20 R21 R22 R25 R26 R27 R30 R31 R33 R34 R35 R36 R37 R47 R48 R50 R63 R64: PackageReference=R0805
U1: library part DS26LV32AM
U2: library part SNJ54ACT00W
U3: library part SNJ54ACT04W, "Hex Inverter"
U4 U9: "fast,precision comparator", ComponentLink1Description="Manufacturer Link", ComponentLink1URL=http://www.analog.com/, DatasheetVersion=1992, LatestRevisionDate=04-Mar-2005, LatestRevisionNote="Stylized 3D Model Added.", PackageDescription="DIP; 8 Leads; Row Spacing 7.62 mm; Pitch 2.54 mm", PackageReference=Q-8, PackageVersion=1998, Published=8-Jun-2000, Publisher="Altium Limited"
U10 U11 U12 U13 U16 U19: library part AD797
U14 U15: library part AD8130
U17: library part LTC1560
U18: library part AD8131

## Free pads (board coordinates)
  round 5.08 hole 3.302: 0(5.75,4) 0(5.75,54) 0(148.71,4) 0(148.71,54) 0(214.25,4) 0(214.25,54)
  round 3.048 hole 1.727: 0(57.85,5) 0(188.925,5.098)
  round 1.524 hole 0.762: 3(134.475,40.225)

## Via types
v1: diameter 1.016, hole 0.711, Top Layer to Bottom Layer, 81 vias
v2: diameter 1.017, hole 0.711, Top Layer to Bottom Layer, 1 vias

## Nets (pads, with @x,y where several pads share a name; then routed paths per layer and width w, separated by ;. In a path a pad name is that pad's centre, name@x,y a point inside that pad or via, vN(x,y) a via of type N, cw(c..) or ccw(c..) an arc to the next point about the centre after c; other vN are vias at no path point)
+5D: C3.1 C4.1 C7.2 C14.2 C17.1 C18.1 C19.2 C22.1 C23.1 C24.1 C25.1 C26.2 C27.2 C28.2 C29.2 C30.2 C31.1 D14.2 D15.2 D16.2 D17.2 E10.1 R10.2 R13.2 R17.2 R23.2 T1.4 T2.6 T3.4 T4.6 U1.4 U1.16 U2.14 U3.14 U4.1 U4.8 U5.1 U5.8 U6.1 U6.8 U7.1 U7.8 U8.1 U8.8 U9.1 U9.8 | length 125.7
  Top Layer w1.016: R23.2@16.752,46.7 18.6,46.7 19.8,45.5 U9.1@19.8,43.875 ; R10.2@39.319,46.7 41.15,46.7 42.367,45.483 U4.1@42.367,43.875 ; U7.1@49.35,22.975 U7.8@55.192,22.975 ; U8.1@49.375,16.775 v1(52.296,16.775) U8.8@55.217,16.775 ; U6.1@49.4,35.775 U6.8@55.242,35.775 ; U5.1@49.4,42.4 U5.8@55.242,42.4 ; D17.2@59.875,15.945 63.345,15.945 68.643,21.243 T3.4@68.643,23.982 66.731,22.07 D16.2@60.05,22.07 ; D15.2@59.925,35.245 v1@62.095,35.245 ; D14.2@59.925,41.62 v1@62.13,41.62
  Bottom Layer w1.016: C3.1@7.215,15.457 U1.16@7.215,18.795 ; R17.2@14.212,38.725 17.33,38.725 U9.8@19.8,36.255 ; U9.1@19.8,43.875 C31.1@19.8,49.1 ; U2.14@20.882,25.224 C19.2@20.882,27.525 ; R13.2@36.779,38.65 39.972,38.65 U4.8@42.367,36.255 ; U4.1@42.367,43.875 C17.1@42.367,46.525 C18.1@42.367,49.3 ; U3.14@43.1,25.206 C14.2@43.1,27.568 ; v1(52.296,16.775) C28.2@57.85,16.775 ; v1(52.3,35.9) 57.75,35.9 C29.2@57.875,35.775 ; v1(52.325,42.475) C26.2@57.782,42.475 ; v1@52.4,22.975 C23.1@55.192,22.975 C27.2@57.825,22.975 ; C4.1@54.525,47.575 C7.2@59.125,47.575 E10.1@59.125,53.6
  other v1: 52.3,22.875 62.125,35.275 62.15,41.6
+5V: C75.1 C76.1 D8.2 D36.3 U17.6 | length 36.9
  Top Layer w1.016: v1(201.35,36.775) D8.2@203.62,36.775 ; U17.6@211.597,25.407 211.597,24.4 v1(212.75,23.247)
  S2 w1.016: v1(208.4,25.496) 210.501,25.496 v1(212.75,23.247)
  S3 w1.016: v1(201.35,36.775) 202.825,35.3 207.3,35.3 208.4,34.2 v1(208.4,25.496)
  Bottom Layer w1.016: D36.3@204.237,22.99 204.237,24.137 205.596,25.496 v1(208.4,25.496) C75.1@209.7,25.496 ; C75.1@210.325,25.496 C76.1@210.325,28.171
+8V: C5.1 C8.1 C10.1 C65.1 C66.2 C69.1 C70.2 D6.3 E7.1 R43.2 R44.2 R49.2 R50.2 R59.2 R65.2 U14.3 U14.7 U15.3 U15.7 | length 80.2
  Top Layer w1.016: U15.3@176.351,17.948 176.351,15.499 v1(177.475,14.375) 177.621,14.229 U15.7@177.621,12.106 ; U14.3@176.351,45.925 176.351,43.949 v1(177.525,42.775) 177.621,42.679 U14.7@177.621,40.083 ; D6.3@204.584,47.686 E7.1@204.584,53.246
  Bottom Layer w1.016: v1(145.525,30.475) 145.575,30.425 R44.2@148.545,30.425 ; R43.2@153.745,54.625 153.745,54.995 154.945,56.195 158.705,56.195 v1(160,54.9) ; R49.2@155.022,30.45 v1(158.7,30.45) ; R50.2@160.375,3.7 163.325,3.7 v1(163.45,3.575) ; C70.2@176.421,7.85 177.621,9.05 C69.1@177.621,12.106 ; C69.1@177.475,12.252 v1(177.475,14.375) 179.175,14.375 180.35,15.55 180.35,23.207 R59.2@179.432,24.125 ; C66.2@177.495,36.4 C65.1@177.495,40.206 ; C65.1@177.525,40.236 v1(177.525,42.775) ; v1(201.075,21.2) 201.136,21.261 R65.2@201.136,23.496 ; E7.1@204.584,53.246 207.4,50.429 207.4,46.131 C5.1@207.505,46.026 C10.1@207.505,37.9
-5V: C79.1 C80.1 D11.3 D37.2 U17.4 U17.5 | length 64.2
  Top Layer w1.016: D11.3@196.09,36.775 v1@198.75,36.775 ; U17.4@210.275,31.3 v1(210.275,35.725) ; v1(210.327,23.452) U17.5@210.327,25.407
  S2 w1.016: v1(198.75,36.8) 199.399,36.8 200.771,38.172 207.828,38.172 v1(210.275,35.725)
  S3 w1.016: v1(208.775,4.175) 208.775,21.9 v1(210.327,23.452) 210.327,35.673 v1(210.275,35.725)
  Bottom Layer w1.016: D37.2@204.375,5.12 205.32,4.175 v1(208.775,4.175) v1@208.975,4.175 ; C79.1@210.325,30.846 C80.1@210.325,33.521 v1@210.325,35.675
-8V: C6.2 C9.2 C11.1 C67.2 C68.2 C71.2 C72.2 D9.2 E9.1 R45.2 R46.2 R47.2 R48.2 R57.2 R61.2 U14.2 U15.2 | length 56.8
  Top Layer w1.016: v1(177.4,48.4) 177.621,48.179 U14.2@177.621,45.925 ; U15.2@177.621,17.948 v1@177.621,19.904 ; E9.1@188.65,53.246 192.925,48.971 195.973,48.971 197.055,47.89 D9.2@197.055,47.638
  Bottom Layer w1.016: R48.2@143.717,13.7 R47.2@147.4,13.7 ; R46.2@144.517,45.05 R45.2@148.175,45.05 ; v1(166.225,31.325) 166.225,31.95 R57.2@170.15,35.875 ; C71.2@177.457,21.675 177.457,18.114 C72.2@177.621,17.95 ; C67.2@177.457,50.175 177.457,46.089 C68.2@177.495,46.05 ; E9.1@188.65,53.246 188.875,53.021 188.875,47.75 193.188,43.437 C9.2@193.188,40.746 193.188,39.277 C11.1@194.585,37.88 ; R61.2@204.593,31.525 v1(204.593,33.657)
  other v1: 145.55,13.725 177.475,20.05 146.325,45.025
AGND: C5.2 C6.1 C8.2 C9.1 C10.2 C11.2 C41.1 C42.1 C43.1 C44.1 C45.2 C46.1 C47.1 C48.1 C51.2 C54.1 C55.1 C56.2 C57.2 C58.2 C59.2 C60.2 C65.2 C66.1 C67.1 C68.1 C69.2 C70.1 C71.1 C72.1 C75.2 C76.2 C77.1 C78.1 C79.2 C80.2 C82.2 C84.2 C86.1 C87.1 C88.2 C89.2 C90.1 C91.2 C93.2 C95.2 D30.2 D31.2 D32.1 D33.1 E8.1 pad.0@188.925,5.098 pad.3 R51.2 R52.2 R69.2 R71.1 U14.4 U15.4 U17.1 U17.3 U17.7 U18.1 U18.2 | length 235
  Top Layer w1.016: v1@134.252,14.223 D31.2@134.252,16.648 ; D32.1@134.452,37.28 pad.3@134.452,40.202 ; v1(171.653,48.775) 174.125,48.775 175.081,47.819 U14.4@175.081,45.925 ; v1(171.875,20.2) 174.325,20.2 175.081,19.444 U15.4@175.081,17.948 ; v1(176.95,3.15) 177.082,3.282 R52.2@177.082,6.3 ; R51.2@177.082,35.525 181.05,35.525 182.109,34.466 R71.1@185.675,34.466 R69.2@185.675,36.756 ; U17.3@211.597,31.249 211.597,34.997 v1(212.4,35.8) 214.137,34.063 U17.1@214.137,31.249 214.137,28.103 212.867,26.833 U17.7@212.867,25.407 ; U18.2@212.303,17.216 U18.1@213.573,17.216 v1@213.573,20.777
  Bottom Layer w1.016: v1@134.252,14.223 D33.1@134.252,16.648 ; D30.2@134.452,37.28 134.452,40.077 pad.3@134.475,40.1 ; v1(141.8,35.15) 141.946,35.15 C41.1@144.346,37.55 ; C45.2@143.717,15.9 C43.1@147.4,15.9 ; C42.1@144.517,47.225 C46.1@148.2,47.225 ; C59.2@147.148,22.775 145.175,24.748 145.175,27.45 145.85,28.125 C60.2@148.545,28.125 ; v1(147.775,8.85) 147.8,8.875 C44.1@151.075,8.875 ; C57.2@152.516,50.123 152.516,48.684 v1(152.725,48.475) 153.677,47.523 C58.2@153.911,47.523 ; C51.2@155.022,28.125 168.445,28.125 C78.1@168.945,28.625 168.945,30.77 169.65,31.475 C77.1@170.45,31.475 ; C54.1@156.6,36.05 158,34.65 158,32.7 v1(157.975,32.675) ; C56.2@160.467,11.094 160.467,9.866 C55.1@161.864,8.469 164.125,6.208 v1(164.125,6.05) ; C48.1@161.661,20.725 161.661,18.139 v2(161.725,18.075) ; C47.1@163.35,48.3 165.6,46.05 C68.1@171.653,46.05 ; C71.1@175.425,21.675 173.275,21.675 171.779,20.179 171.779,9.146 173.075,7.85 C70.1@174.389,7.85 174.389,5.711 v1(176.95,3.15) ; C67.1@175.425,50.175 172.725,50.175 171.653,49.103 v1(171.653,48.775) C68.1@171.653,46.05 ; C66.1@175.463,36.4 175.46,36.4 171.325,40.535 171.325,45.722 C68.1@171.653,46.05 ; C82.2@179.432,31.475 180.879,30.028 C84.2@180.879,28.875 ; C87.1@190.695,28.521 190.695,29.991 C86.1@192.075,31.371 191.604,31.371 192.025,31.791 v1(192.025,33.175) ; C11.2@196.617,37.88 C6.1@196.617,46.026 ; E8.1@196.617,53.246 C6.1@196.617,46.026 ; C93.2@201.236,31.371 202.633,29.974 C95.2@202.633,28.596 203.7,27.529 v1(203.7,26.175) ; C10.2@205.493,37.88 204.071,39.302 C8.2@204.071,40.746 203.539,40.746 201.35,42.935 201.35,46.026 C5.2@201.305,46.026 C6.1@196.617,46.026 ; C75.2@212.357,25.496 C76.2@212.357,28.171 C79.2@212.357,30.846 C80.2@212.357,33.521 v1@212.357,35.757 ; v1(213.475,20.875) 214.462,19.888 C88.2@214.462,18.171 214.462,16.793 C89.2@213.065,15.396 C90.1@213.065,13.196 214.462,11.799 C91.2@214.462,10.621
  other v1: 134.375,14.1 145.5,15.875 158.625,28.025 145.625,28.05 180.425,30.525 182.65,34.425 146.375,47.2
ANTENNAECHO+: E6.1 Q4.2 R6.1 | length 28.3
  Top Layer w1.016: E6.1@108.69,32.079 110.769,30 121.15,30 122.125,30.975 Q4.2@122.125,33.725
  S2 w1.016: R6.1@98.385,30.729 99.735,32.079 E6.1@108.69,32.079
ANTENNAECHO-: E5.1 Q3.2 R5.1 | length 28.6
  Top Layer w1.016: E5.1@108.69,25.696 111.319,28.325 120.9,28.325 122.125,27.1 Q3.2@122.125,24.418
  S2 w1.016: R5.1@98.385,27.1 99.789,25.696 E5.1@108.69,25.696
DGND: C3.2 C4.2 C7.1 C12.1 C13.2 C14.1 C15.1 C16.2 C17.2 C18.2 C19.1 C22.2 C23.2 C24.2 C25.2 C26.1 C27.1 C28.1 C29.1 C30.1 C31.2 C32.1 C33.1 C36.2 D5.2 D12.1 D13.1 E11.1 pad.0@57.85,5 R7.1 R8.1 R11.1 R12.2 R15.1 R16.1 R18.2 R24.2 R33.1 R36.2 U1.8 U1.12 U2.4 U2.5 U2.7 U3.1 U3.3 U3.7 U3.13 U4.4 U4.6 U5.4 U5.5 U6.4 U6.5 U7.4 U7.5 U8.4 U8.5 U9.4 U9.6 | length 224.9
  Top Layer w1.016: R18.2@16.752,49.25 C32.1@16.752,51.925 19.45,51.925 v1(19.525,52) ; U1.12@17.375,18.795 20.13,21.55 R33.1@30.693,21.55 ; D5.2@31.269,53.025 32.875,54.631 38.494,54.631 39.325,53.8 C15.1@39.325,51.925 ; C36.2@32.725,16.25 35.925,16.25 D12.1@38.375,13.8 ; v1(38.375,8.375) 38.4,8.4 R15.1@40.675,8.4 ; D13.1@38.4,16.5 40.275,16.5 40.675,16.9 R16.1@40.675,18.925 ; R12.2@39.325,49.257 C15.1@39.325,51.925 ; v1(41.825,52.025) 41.725,51.925 C15.1@39.325,51.925 ; U7.4@49.35,19.165 v1(52.3,19.165) U7.5@55.192,19.165 ; U8.4@49.375,12.965 U8.5@55.217,12.965 ; U6.4@49.4,31.965 U6.5@55.242,31.965 ; U5.4@49.4,38.59 v1(52.325,38.59) U5.5@55.242,38.59 ; v1@128.15,26.475 R36.2@130.418,26.475
  S3 w1.016: v1(109.05,8.425) 119.875,8.425 128.159,16.709 v1@128.159,26.416
  Bottom Layer w1.016: C33.1@6.05,38.65 4.646,40.054 R24.2@4.646,41.925 4.646,44.146 6.2,45.7 10.355,45.7 U9.4@12.18,43.875 ; C3.2@9.279,15.425 14.005,15.425 U1.12@17.375,18.795 ; U2.4@13.28,32.826 13.28,29.445 15.2,27.525 C19.1@18.85,27.525 ; C30.1@16.371,46.35 16.371,47.703 C31.2@17.768,49.1 17.768,50.243 v1(19.525,52) ; C16.2@25.382,30.15 27.86,32.628 U3.7@27.86,32.826 ; C12.1@28.297,38.65 26.9,40.047 R11.1@26.9,41.95 26.9,44.375 28.475,45.95 32.672,45.95 U4.4@34.747,43.875 ; C13.2@33.804,30.075 35.27,30.075 U3.3@38.02,32.826 ; C17.2@38.938,46.525 38.938,47.903 C18.2@40.335,49.3 40.335,50.535 v1(41.825,52.025) ; U3.13@40.56,25.206 41.075,25.72 C14.1@41.075,27.575 ; C4.2@48.25,47.575 48.25,49.7 E11.1@52.275,53.725 ; v1(52.3,19.165) 52.681,19.546 C23.2@55.192,19.546 56.428,19.546 C27.1@57.825,20.943 ; v1(52.325,13.025) 54.904,13.025 C24.2@55.125,13.246 56.622,14.743 C28.1@57.85,14.743 ; v1(52.325,32) 54.896,32 C25.2@55.242,32.346 56.478,32.346 C29.1@57.875,33.743 ; v1(52.325,38.59) 54.861,38.59 55.121,38.85 56.375,38.85 C26.1@57.875,40.35 ; C7.1@61.157,47.575 v1@63.725,47.575 ; R8.1@88.14,30.729 R7.1@88.14,26.8 88.215,26.725 v1(91.025,26.725)
  other v1: 128.15,26.425 63.75,47.6
NetC12_2: C12.2 D1.2 D2.2 D3.3 R11.2 U4.2 | length 68.8
  Top Layer w1.016: D3.3@30.329,41.95 37.902,41.95 U4.2@39.827,43.875
  S2 w1.016: U4.2@39.827,43.875 39.827,45.173 41.479,46.825 62.225,46.825 64.451,44.599 D2.2@64.451,30.805
  S3 w1.016: D1.2@64.451,27.226 D2.2@64.451,30.805
  Bottom Layer w1.016: C12.2@30.329,38.65 R11.2@30.329,41.95 37.902,41.95 U4.2@39.827,43.875
NetC13_1: C13.1 R9.1 U3.9 | length 4.8
  Bottom Layer w1.016: U3.9@30.375,25.231 C13.1@30.375,30.075
NetC15_2: C15.2 R10.1 R12.1 U4.3 | length 8.1
  Top Layer w1.016: U4.3@37.287,43.875 37.293,43.881 C15.2@37.293,51.925
NetC16_1: C16.1 R14.2 U2.1 | length 7.3
  Bottom Layer w1.016: U2.1@20.9,32.826 20.9,31.125 21.875,30.15 C16.1@23.35,30.15 R14.2@23.35,27.451
NetC20_1: C20.1 R14.1 U3.8 | length 18.4
  Top Layer w1.016: U3.8@27.86,25.206 29.766,23.3 38.925,23.3 C20.1@40.675,21.55
  Bottom Layer w1.016: R14.1@25.382,27.451 25.4,27.433 25.4,26.25 26.444,25.206 U3.8@27.86,25.206
NetC20_2: C20.2 D13.2 R16.2 TP4.1 U5.2 U7.2 | length 41.4
  Top Layer w1.016: D13.2@45.5,16.5 43.3,16.5 42.707,17.093 R16.2@42.707,18.925 C20.2@42.707,21.55 49.195,21.55 U7.2@49.35,21.705 ; TP4.1@47.091,39.25 47.091,40.491 47.73,41.13 U5.2@49.4,41.13
  S3 w1.016: D13.2@45.5,16.5 45.5,37.66 TP4.1@47.091,39.25
NetC21_1: C21.1 U2.11 | length 37.8
  Top Layer w1.016: v1(36.625,12.675) 36.675,12.675 38.4,10.95 C21.1@40.675,10.95
  S3 w1.016: U2.11@13.28,25.206 15.111,23.375 33.525,23.375 35.05,21.85 35.05,14.25 v1(36.625,12.675)
NetC21_2: C21.2 D12.2 R15.2 TP5.1 U6.2 U8.2 | length 34.5
  Top Layer w1.016: R15.2@42.707,8.4 44.104,9.797 C21.2@44.104,10.95 44.104,12.429 D12.2@45.475,13.8 47.18,15.505 U8.2@49.375,15.505 ; TP5.1@47.25,33.375 48.38,34.505 U6.2@49.4,34.505
  S3 w1.016: D12.2@45.475,13.8 46.2,13.8 47.25,14.85 TP5.1@47.25,33.375
NetC32_2: C32.2 R18.1 R23.1 U9.3 | length 8
  Top Layer w1.016: U9.3@14.72,43.875 R23.1@14.72,46.7 R18.1@14.72,49.25 C32.2@14.72,51.925
NetC33_2: C33.2 D18.2 D19.2 R24.1 U9.2 | length 139
  S2 w1.016: U9.2@17.26,43.875 17.26,47.265 20.32,50.325 84.877,50.325 86.933,52.381 128.844,52.381 132.374,48.851 D19.2@133.391,48.851
  S3 w1.016: D19.2@133.391,48.851 D18.2@133.391,51.451
  Bottom Layer w1.016: C33.2@8.082,38.65 8.075,38.657 R24.1@8.075,41.925 15.31,41.925 U9.2@17.26,43.875